# EAGLE board 1- Sangue ABO (EAGLE 9.7.0)

Size 144.3 x 42.05 mm. Coordinates in mm from the lower left corner, seen from the top.
Outline: 0,0 144.3,0 144.3,42.05 0,42.05 0,0
Copper layers (1*16): Top 0.035mm / dielectric 1.5mm / Bottom 0.035mm
Design rules "default": minimum track width 6mil, minimum drill 0.35mm, track to track 6mil, track to pad 6mil, pad to pad 6mil, via to via 6mil, smd to smd 6mil, copper to edge 40mil, drill to drill 6mil, minimum pad ring 10mil, minimum via ring 8mil, stop-mask expansion 4mil, vias tented up to drill 0mil, thermal gap 10mil

## Footprints (pad centres in the part's own frame; a part is rotated, then mirrored left to right if it is on the bottom)
LEDRD254W60D565H860B_Y = drill 0.981 pad 1.581: 1 -1.27,0; 2 1.27,0
LEDRD254W60D565H860B_W = drill 0.981 pad 1.581: 1 -1.27,0; 2 1.27,0
LEDRD254W60D565H860B_B = drill 0.981 pad 1.581: 1 -1.27,0; 2 1.27,0
LEDRD254W60D565H860B_G = drill 0.981 pad 1.581: 1 -1.27,0; 2 1.27,0
BATTERY-GENERIC = drill 1.118 pad 3.15 octagon: + 2.54,0; - -2.54,0
RESAD1016W63L850D250B = drill 0.83 pad 1.43: 1 -5.08,0; 2 5.08,0
78B04ST = drill 0.8: 1 -3.81,-3.81; 2 -1.27,-3.81; 3 1.27,-3.81; 4 3.81,-3.81; 5 3.81,3.81; 6 1.27,3.81; 7 -1.27,3.81; 8 -3.81,3.81
DIP762W53P254L1969H508Q14B = drill 0.743 pad 1.343: 1 -3.81,7.62; 2 -3.81,5.08; 3 -3.81,2.54; 4 -3.81,0; 5 -3.81,-2.54; 6 -3.81,-5.08; 7 -3.81,-7.62; 8 3.81,-7.62; 9 3.81,-5.08; 10 3.81,-2.54; 11 3.81,0; 12 3.81,2.54; 13 3.81,5.08; 14 3.81,7.62

## Placement (x,y rotation side)
DA  YELLOW  [LEDRD254W60D565H860B_Y]  113.84,10.22 180 top
DAB  WHITE  [LEDRD254W60D565H860B_W]  129.08,10.22 180 top
DB  BLUE  [LEDRD254W60D565H860B_B]  121.46,10.22 180 top
DO  GREEN  [LEDRD254W60D565H860B_G]  136.7,10.22 180 top
PFONTE  BATTERYGENERIC  [BATTERY-GENERIC]  8.26,8.26 180 top
R1  390  [RESAD1016W63L850D250B]  115.11,33.08 90 top
R2  390  [RESAD1016W63L850D250B]  130.35,33.08 90 top
R3  390  [RESAD1016W63L850D250B]  137.97,33.08 90 top
R4  390  [RESAD1016W63L850D250B]  122.73,33.08 90 top
SWDIP_SWITCH  SPST-478B04ST  [78B04ST]  40.18,16.57 0 top
UAND  74HC08_PDIP  [DIP762W53P254L1969H508Q14B]  97.33,16.57 90 top
UNOT  74HC04_PDIP  [DIP762W53P254L1969H508Q14B]  77.01,16.57 90 top
UXOR  74HC86_PDIP  [DIP762W53P254L1969H508Q14B]  56.69,16.57 90 top

## Library data of the parts
DA = Tinkercad; CATEGORY: Opto-Electronic; SUB-CATEGORY: LED; VALUE: LED_YELLOW
DAB = Tinkercad; CATEGORY: Opto-Electronic; SUB-CATEGORY: LED; VALUE: LED_WHITE
DB = Tinkercad; CATEGORY: Opto-Electronic; SUB-CATEGORY: LED; VALUE: LED_BLUE
DO = Tinkercad; CATEGORY: Opto-Electronic; SUB-CATEGORY: LED; VALUE: LED_GREEN
PFONTE R1-R4 SWDIP_SWITCH UAND UNOT UXOR = Tinkercad

## Nets
DAB_A: DAB.1 R2.1
PFONTE+: PFONTE.+ R1.2 R2.2 R3.2 R4.2 UAND.14 UNOT.14 UXOR.14
PFONTE-: DA.2 DAB.2 DB.2 DO.2 PFONTE.- SWDIP_SWITCH.1 SWDIP_SWITCH.4 UAND.7 UNOT.7 UXOR.7
SWDIP_SWITCH_7: SWDIP_SWITCH.6 SWDIP_SWITCH.7
UAND_4A: DB.1 R2.1 R4.1 SWDIP_SWITCH.5 UAND.12 UXOR.12
UAND_4B: R1.1 SWDIP_SWITCH.8 UAND.13 UXOR.13
UAND_4Y: DO.1 R3.1 UAND.11
UNOT_6A: UNOT.13 UXOR.11
UNOT_6Y: DA.1 R1.1 UNOT.12

## Tracks (layer width: path | path; a pad name or v marks a point on that pad's centre or on a via)
DAB_A  (1 unrouted)
PFONTE+  (9 unrouted)
PFONTE-  (9 unrouted)
SWDIP_SWITCH_7  (1 unrouted)
UAND_4A  (5 unrouted)
UAND_4B  (3 unrouted)
UAND_4Y  (2 unrouted)
UNOT_6A  (1 unrouted)
UNOT_6Y  (2 unrouted)